# Altium PCB AC_board.PcbDoc (part 2 of 3)
Units mil, origin at the board's own origin, x right, y up, seen from the top; angles counter-clockwise.
Board outline 5905.51 x 3937.01 mil, 4 copper layers (Top Layer, Layer 1, Layer 2, Bottom Layer), stack 31.891 mil thick; 28 components, 29 nets, 132 pads, 3623 vias.
Unrouted connection lines stored in the file: 10.
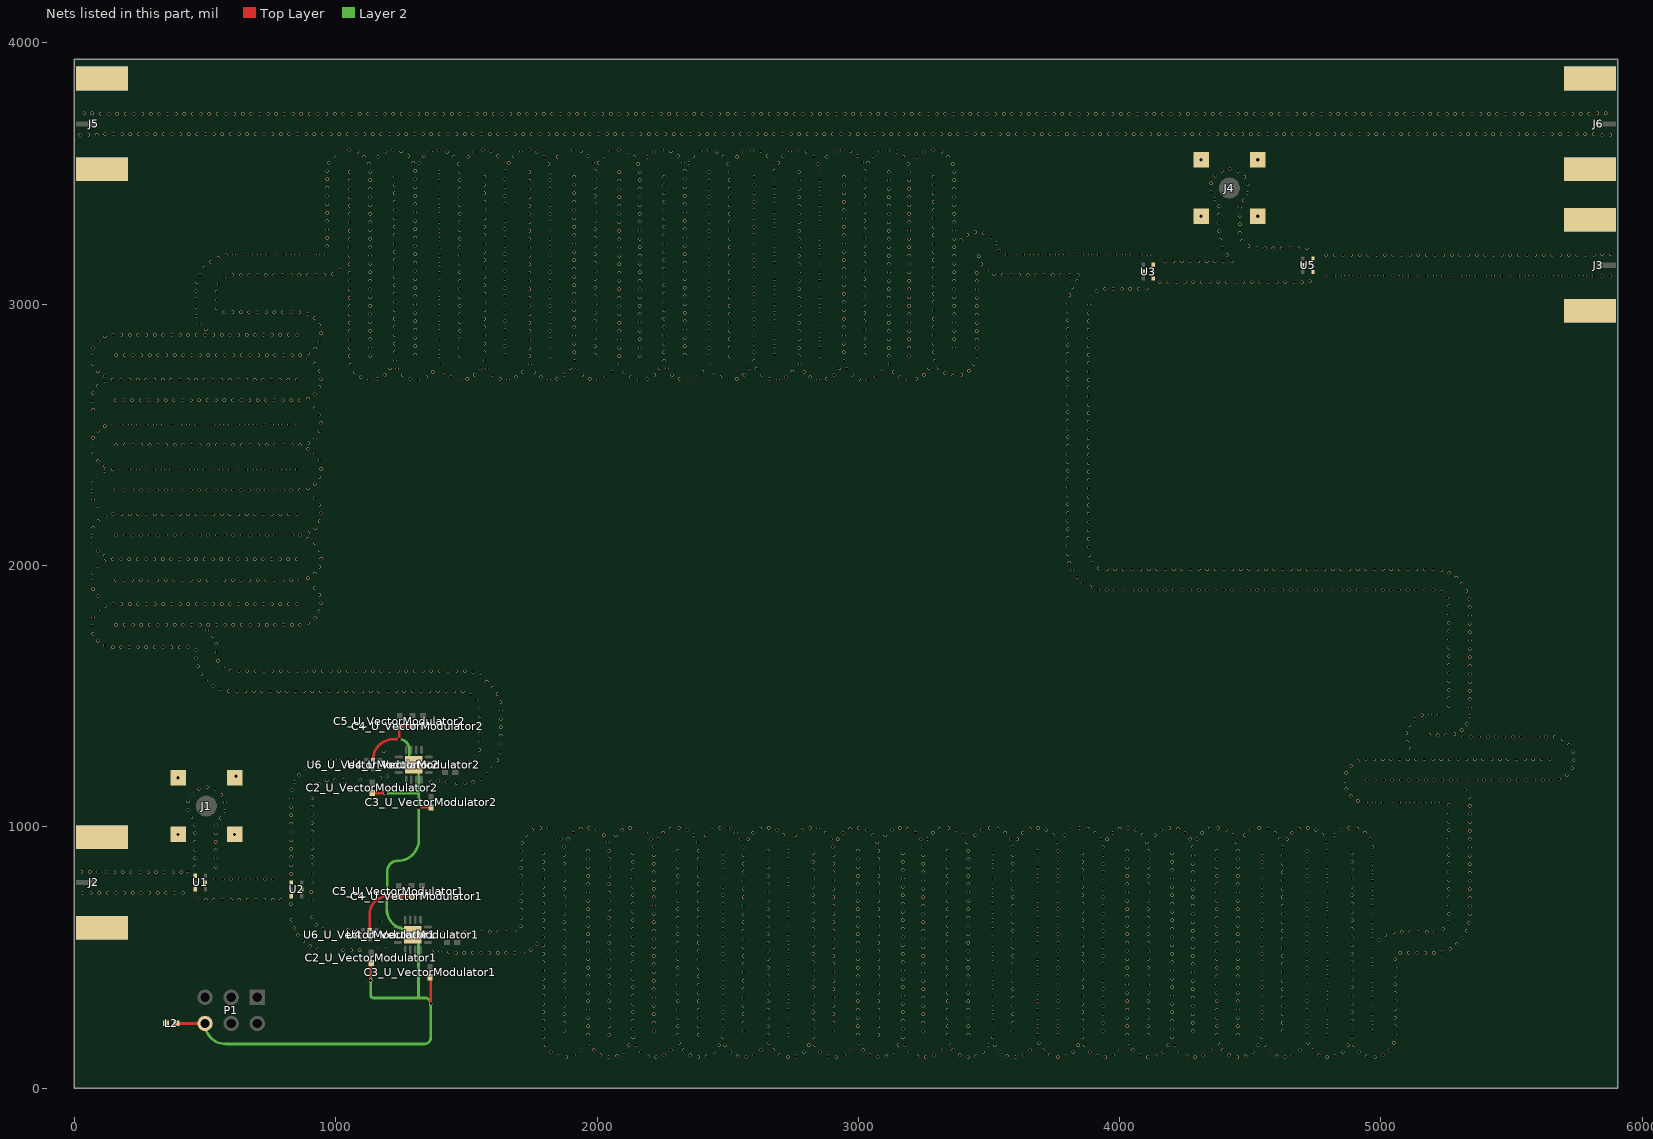
[diagram p4: the nets of this part, all layers, seen from the top]

## Via types
v1: diameter 12, hole 10, Top Layer to Bottom Layer, 3602 vias
v2: diameter 14, hole 12, Top Layer to Bottom Layer, 11 vias
v3: diameter 15, hole 12, Top Layer to Bottom Layer, 10 vias

## Nets (pads, with @x,y where several pads share a name; then routed paths per layer and width w, separated by ;. In a path a pad name is that pad's centre, name@x,y a point inside that pad or via, vN(x,y) a via of type N, cw(c..) or ccw(c..) an arc to the next point about the centre after c; other vN are vias at no path point) (continued)
AGND: (continued)
  other v1: 1882.51,118.79 2043.94,118.68 2226.3,118.79 2387.74,118.68 2570.08,118.79 2731.54,118.68 2913.86,118.79 3075.33,118.68 3257.64,118.79 3419.13,118.68 3601.43,118.79 3762.93,118.68 3945.21,118.79 4106.73,118.68 4288.99,118.79 4450.53,118.68 4632.78,118.78 4794.32,118.68 4976.56,118.78 1850.76,122.8 2075.63,123.11 2194.55,122.8 2419.43,123.12 2538.33,122.8 2763.23,123.12 2882.11,122.81 3107.02,123.12 3225.9,122.81 3450.82,123.12 3569.68,122.81 3794.62,123.13 3913.47,122.82 4138.42,123.13 4257.25,122.82 4482.21,123.13 4601.03,122.82 4826.01,123.14 4944.82,122.82 1913.41,127.12 2012.98,126.81 2257.19,127.12 2356.78,126.8 2600.98,127.11 2700.58,126.8 2944.76,127.11 3044.38,126.8 3288.54,127.11 3388.18,126.79 3632.33,127.11 3731.98,126.79 3976.11,127.1 4075.77,126.79 4319.9,127.1 4419.57,126.78 4663.68,127.1 4763.37,126.78 5007.46,127.09 1822.99,138.69 2103.3,139.19 2166.77,138.69 2447.1,139.19 2510.56,138.7 2790.89,139.2 2854.34,138.7 3134.69,139.2 3198.13,138.71 3478.49,139.21 3541.91,138.71 3822.28,139.21 3885.7,138.72 4166.08,139.22 4229.48,138.72 4509.88,139.22 4573.27,138.73 4853.67,139.23 4917.05,138.73 1987.35,145.96 2331.15,145.95 2674.94,145.95 3018.74,145.94 3362.53,145.93 3706.33,145.93 4050.12,145.92 4393.92,145.92 4737.71,145.91 1938.79,146.61 2282.57,146.61 2626.36,146.6 2970.14,146.59 3313.93,146.59 3657.72,146.58 4001.5,146.58 4345.29,146.57 4689.08,146.57 5032.86,146.56 1803.25,163.87 2147.04,163.88 2490.82,163.89 2834.61,163.9 3178.4,163.9 3522.19,163.91 3865.97,163.92 4209.76,163.92 4553.55,163.93 4897.34,163.94 2122.7,164.63 2466.5,164.64 2810.29,164.65 3154.08,164.66 3497.88,164.66 3841.67,164.67 4185.46,164.68 4529.26,164.68 4873.05,164.69 4377.69,173.5 4721.49,173.49 1971.14,173.55 2314.93,173.54 2658.72,173.53 3002.52,173.52 3346.31,173.52 3690.11,173.51 4033.9,173.5 5048.91,174.25 1794.77,194.73 2138.56,194.74 2482.35,194.75 2826.14,194.75 3169.93,194.76 3513.72,194.77 3857.51,194.78 4201.3,194.78 4545.09,194.79 4888.88,194.8 1966.39,205.19 2045.19,204.73 2310.18,205.19 2388.98,204.82 2653.98,205.18 2732.77,204.9 2997.77,205.17 3076.56,204.98 3341.56,205.16 3420.35,205.05 3685.35,205.15 3764.14,205.12 4029.14,205.15 4107.93,205.18 4372.93,205.14 4451.72,205.23 4716.72,205.13 4795.52,205.28 5053.36,205.94 1873.29,219.35 2217.08,219.27 2560.88,219.19 2904.67,219.12 3248.46,219.05 3592.25,218.98 3936.04,218.92 4279.83,218.87 4623.62,218.83 4967.41,218.79 1794.5,226.73 2138.29,226.74 2482.08,226.74 2825.87,226.75 3169.66,226.76 3513.45,226.77 3857.24,226.78 4201.03,226.78 4544.82,226.79 4888.62,226.8 1966.39,237.19 2045.19,236.73 2310.18,237.19 2388.98,236.82 2653.98,237.18 2732.77,236.9 2997.77,237.17 3076.56,236.98 3341.56,237.16 3420.35,237.05 3685.35,237.15 3764.14,237.12 4029.14,237.15 4107.93,237.18 4372.93,237.14 4451.72,237.23 4716.72,237.13 4795.52,237.28 5053.36,237.94 1873.29,251.35 2217.08,251.27 2560.88,251.19 2904.67,251.12 3248.46,251.05 3592.25,250.98 3936.04,250.92 4279.83,250.87 4623.62,250.83 4967.41,250.79 1794.5,258.73 2138.29,258.74 2482.08,258.74 2825.87,258.75 3169.66,258.76 3513.45,258.77 3857.24,258.78 4201.03,258.78 4544.82,258.79 4888.62,258.8 1966.39,269.19 2045.19,268.73 2310.18,269.19 2388.98,268.82 2653.98,269.18 2732.77,268.9 2997.77,269.17 3076.56,268.98 3341.56,269.16 3420.35,269.05 3685.35,269.15 3764.14,269.12 4029.14,269.15 4107.93,269.18 4372.93,269.14 4451.72,269.23 4716.72,269.13 4795.52,269.28 5053.36,269.94 1873.29,283.35 2217.08,283.27 2560.88,283.19 2904.67,283.12 3248.46,283.05 3592.25,282.98 3936.04,282.92 4279.83,282.87 4623.62,282.83 4967.41,282.79 1794.5,290.73 2138.29,290.74 2482.08,290.74 2825.87,290.75 3169.66,290.76 3513.45,290.77 3857.24,290.78 4201.03,290.78 4544.82,290.79 4888.62,290.8 1966.39,301.19 2045.19,300.73 2310.18,301.19 2388.98,300.82 2653.98,301.18 2732.77,300.9 2997.77,301.17 3076.56,300.98 3341.56,301.16 3420.35,301.05 3685.35,301.15 3764.14,301.12 4029.14,301.15 4107.93,301.18 4372.93,301.14 4451.72,301.23 4716.72,301.13 4795.52,301.28 5053.36,301.94 1873.29,315.35 2217.08,315.27 2560.88,315.19 2904.67,315.12 3248.46,315.05 3592.25,314.98 3936.04,314.92 4279.83,314.87 4623.62,314.83 4967.41,314.79 1794.5,322.73 2138.29,322.74 2482.08,322.74 2825.87,322.75 3169.66,322.76 3513.45,322.77 3857.24,322.78 4201.03,322.78 4544.82,322.79 4888.62,322.8 1966.39,333.19 2045.19,332.73 2310.18,333.19 2388.98,332.82 2653.98,333.18 2732.77,332.9 2997.77,333.17 3076.56,332.98 3341.56,333.16 3420.35,333.05 3685.35,333.15 3764.14,333.12 4029.14,333.15 4107.93,333.18 4372.93,333.14 4451.72,333.23 4716.72,333.13 4795.52,333.28 5053.36,333.94 1873.29,347.35 2217.08,347.27 2560.88,347.19 2904.67,347.12 3248.46,347.05 3592.25,346.98 3936.04,346.92 4279.83,346.87 4623.62,346.83 4967.41,346.79 1794.5,354.73 2138.29,354.74 2482.08,354.74 2825.87,354.75 3169.66,354.76 3513.45,354.77 3857.24,354.78 4201.03,354.78 4544.82,354.79 4888.62,354.8 1966.39,365.19 2045.19,364.73 2310.18,365.19 2388.98,364.82 2653.98,365.18 2732.77,364.9 2997.77,365.17 3076.56,364.98 3341.56,365.16 3420.35,365.05 3685.35,365.15 3764.14,365.12 4029.14,365.15 4107.93,365.18 4372.93,365.14 4451.72,365.23 4716.72,365.13 4795.52,365.28 5053.36,365.94 1873.29,379.35 2217.08,379.27 2560.88,379.19 2904.67,379.12 3248.46,379.05 3592.25,378.98 3936.04,378.92 4279.83,378.87 4623.62,378.83 4967.41,378.79 1794.5,386.73 2138.29,386.74 2482.08,386.74 2825.87,386.75 3169.66,386.76 3513.45,386.77 3857.24,386.78 4201.03,386.78 4544.82,386.79 4888.62,386.8 1966.39,397.19 2045.19,396.73 2310.18,397.19 2388.98,396.82 2653.98,397.18 2732.77,396.9 2997.77,397.17 3076.56,396.98 3341.56,397.16 3420.35,397.05 3685.35,397.15 3764.14,397.12 4029.14,397.15 4107.93,397.18 4372.93,397.14 4451.72,397.23 4716.72,397.13 4795.52,397.28 5053.36,397.94 1873.29,411.35 2217.08,411.27 2560.88,411.19 2904.67,411.12 3248.46,411.05 3592.25,410.98 3936.04,410.92 4279.83,410.87 4623.62,410.83 4967.41,410.79 1794.5,418.73 2138.29,418.74 2482.08,418.74 2825.87,418.75 3169.66,418.76 3513.45,418.77 3857.24,418.78 4201.03,418.78 4544.82,418.79 4888.62,418.8 1966.39,429.19 2045.19,428.73 2310.18,429.19 2388.98,428.82 2653.98,429.18 2732.77,428.9 2997.77,429.17 3076.56,428.98 3341.56,429.16 3420.35,429.05 3685.35,429.15 3764.14,429.12 4029.14,429.15 4107.93,429.18 4372.93,429.14 4451.72,429.23 4716.72,429.13 4795.52,429.28 5053.36,429.94 1873.29,443.35 2217.08,443.27 2560.88,443.19 2904.67,443.12 3248.46,443.05 3592.25,442.98 3936.04,442.92 4279.83,442.87 4623.62,442.83 4967.41,442.79 1794.5,450.73 2138.29,450.74 2482.08,450.74 2825.87,450.75 3169.66,450.76 3513.45,450.77 3857.24,450.78 4201.03,450.78 4544.82,450.79 4888.62,450.8 1966.39,461.19 2045.19,460.73 2310.18,461.19 2388.98,460.82 2653.98,461.18 2732.77,460.9 2997.77,461.17 3076.56,460.98 3341.56,461.16 3420.35,461.05 3685.35,461.15 3764.14,461.12 4029.14,461.15 4107.93,461.18 4372.93,461.14 4451.72,461.23 4716.72,461.13 4795.52,461.28 5053.36,461.94 1873.29,475.35 2217.08,475.27 2560.88,475.19 2904.67,475.12 3248.46,475.05 3592.25,474.98 3936.04,474.92 4279.83,474.87 4623.62,474.83 4967.41,474.79 1794.5,482.73 2138.29,482.74 2482.08,482.74 2825.87,482.75 3169.66,482.76 3513.45,482.77 3857.24,482.78 4201.03,482.78 4544.82,482.79 4888.62,482.8 1966.39,493.19 2045.19,492.73 2310.18,493.19 2388.98,492.82 2653.98,493.18 2732.77,492.9 2997.77,493.17 3076.56,492.98 3341.56,493.16 3420.35,493.05 3685.35,493.15 3764.14,493.12 4029.14,493.15 4107.93,493.18 4372.93,493.14 4451.72,493.23 4716.72,493.13 4795.52,493.28 5053.36,493.94 1873.29,507.35 2217.08,507.27 2560.88,507.19 2904.67,507.12 3248.46,507.05 3592.25,506.98 3936.04,506.92 4279.83,506.87 4623.62,506.83 4967.41,506.79 1794.5,514.73 2138.29,514.74 2482.08,514.74 2825.87,514.75 3169.66,514.76 3513.45,514.77 3857.24,514.78 4201.03,514.78 4544.82,514.79 4888.62,514.8 1460.12,516.89 1492.07,518.6 1524.07,518.6 1556.07,518.6 1588.07,518.6 1620.07,518.6 1652.07,518.6 1684.07,518.6 5073.74,518.6 5105.74,518.6 5137.74,518.6 5169.74,518.6 5201.74,518.56 1716.06,519.51 1370,521 1432.09,521.93 5233.46,522.83 1400.13,523.52 1966.39,525.19 2045.19,524.73 2310.18,525.19 2388.98,524.82 2653.98,525.18 2732.77,524.9 2997.77,525.17 3076.56,524.98 3341.56,525.16 3420.35,525.05 3685.35,525.15 3764.14,525.12 4029.14,525.15 4107.93,525.18 4372.93,525.14 4451.72,525.23 4716.72,525.13 4795.52,525.28 1028.25,528.11 1060.25,528.11 1092.25,528.11 1746.38,529.74 932.55,532.48 5263.47,533.93 1161.97,534.79 1873.29,539.35 2217.08,539.27 2560.88,539.19 2904.67,539.12 3248.46,539.05 3592.25,538.98 3936.04,538.92 4279.83,538.87 4623.62,538.83 4967.41,538.79 902.62,543.79 1192.32,544.93 1794.5,546.73 2138.29,546.74 2482.08,546.74 2825.87,546.75 3169.66,546.76 3513.45,546.77 3857.24,546.78 4201.03,546.78 4544.82,546.79 4888.62,546.8 1770.28,551.02 5290.03,551.78 1966.39,557.19 2045.19,556.73 2310.18,557.19 2388.98,556.82 2653.98,557.18 2732.77,556.9 2997.77,557.17 3076.56,556.98 3341.56,557.16 3420.35,557.05 3685.35,557.15 3764.14,557.12 4029.14,557.15 4107.93,557.18 4372.93,557.14 4451.72,557.23 4716.72,557.13 4795.52,557.28 876.38,562.12 4992.56,566.18 1873.29,571.35 2217.08,571.27 2560.88,571.19 2904.67,571.12 3248.46,571.05 3592.25,570.98 3936.04,570.92 4279.83,570.87 4623.62,570.83 4967.41,570.79 5312.04,575.01 1794.5,578.73 2138.29,578.74 2482.08,578.74 2825.87,578.75 3169.66,578.76 3513.45,578.77 3857.24,578.78 4201.03,578.78 4544.82,578.79 4888.62,578.8 854.86,585.79 5016.85,587.02 1966.39,589.19 2045.19,588.73 2310.18,589.19 2388.98,588.82 2653.98,589.18 2732.77,588.9 2997.77,589.17 3076.56,588.98 3341.56,589.16 3420.35,589.05 3685.35,589.15 3764.14,589.12 4029.14,589.15 4107.93,589.18 4372.93,589.14 4451.72,589.23 4716.72,589.13 4795.52,589.28 1444.6,593.17 1411.79,593.75 1493.73,597.4 1525.73,597.4 1557.73,597.4 1589.73,597.4 1621.73,597.4 1653.73,597.4 1685.73,597.4 5047.35,596.69 5079.34,597.4 5111.34,597.4 5143.34,597.4 5175.34,597.4 5207.33,598.17 1873.29,603.35 2217.08,603.27 2560.88,603.19 2904.67,603.12 3248.46,603.05 3592.25,602.98 3936.04,602.92 4279.83,602.87 4623.62,602.83 4967.41,602.79 5327.86,602.83 1047.4,606.91 1073,608 951.47,609.14 5236.93,610.35 1794.5,610.73 2138.29,610.74 2482.08,610.74 2825.87,610.75 3169.66,610.76 3513.45,610.77 3857.24,610.78 4201.03,610.78 4544.82,610.79 4888.62,610.8 839.82,614.04 1708.55,619.83 1966.39,621.19 2045.19,620.73 2310.18,621.19 2388.98,620.82 2653.98,621.18 2732.77,620.9 2997.77,621.17 3076.56,620.98 3341.56,621.16 3420.35,621.05 3685.35,621.15 3764.14,621.12 4029.14,621.15 4107.93,621.18 4372.93,621.14 4451.72,621.23 4716.72,621.13 4795.52,621.28 924.09,625.7 5337.29,633.41 1873.29,635.35 2217.08,635.27 2560.88,635.19 2904.67,635.12 3248.46,635.05 3592.25,634.98 3936.04,634.92 4279.83,634.87 4623.62,634.83 4967.41,634.79 5256.25,635.86 1170.84,638.32 1794.5,642.73 2138.29,642.74 2482.08,642.74 2825.87,642.75 3169.66,642.76 3513.45,642.77 3857.24,642.78 4201.03,642.78 4544.82,642.79 4888.62,642.8 831.39,644.91 1708.55,651.83 1966.39,653.19 2045.19,652.73 2310.18,653.19 2388.98,652.82 2653.98,653.18 2732.77,652.9 2997.77,653.17 3076.56,652.98 3341.56,653.16 3420.35,653.05 3685.35,653.15 3764.14,653.12 4029.14,653.15 4107.93,653.18 4372.93,653.14 4451.72,653.23 4716.72,653.13 4795.52,653.28 909.92,654.39 5339.4,665.34 1873.29,667.35 2217.08,667.27 2560.88,667.19 2904.67,667.12 3248.46,667.05 3592.25,666.98 3936.04,666.92 4279.83,666.87 4623.62,666.83 4967.41,666.79 5260.6,667.56 1794.5,674.73 2138.29,674.74 2482.08,674.74 2825.87,674.75 3169.66,674.76 3513.45,674.77 3857.24,674.78 4201.03,674.78 4544.82,674.79 4888.62,674.8 1708.55,683.83 1966.39,685.19 2045.19,684.73 2310.18,685.19 2388.98,684.82 2653.98,685.18 2732.77,684.9 2997.77,685.17 3076.56,684.98 3341.56,685.16 3420.35,685.05 3685.35,685.15 3764.14,685.12 4029.14,685.15 4107.93,685.18 4372.93,685.14 4451.72,685.23 4716.72,685.13 4795.52,685.28 5339.4,697.34 1873.29,699.35 2217.08,699.27 2560.88,699.19 2904.67,699.12 3248.46,699.05 3592.25,698.98 3936.04,698.92 4279.83,698.87 4623.62,698.83 4967.41,698.79 5260.6,699.56 828,704 1794.5,706.73 2138.29,706.74 2482.08,706.74 2825.87,706.75 3169.66,706.76 3513.45,706.77 3857.24,706.78 4201.03,706.78 4544.82,706.79 4888.62,706.8 1708.55,715.83 1966.39,717.19 2045.19,716.73 2310.18,717.19 2388.98,716.82 2653.98,717.18 2732.77,716.9 2997.77,717.17 3076.56,716.98 3341.56,717.16 3420.35,717.05 3685.35,717.15 3764.14,717.12 4029.14,717.15 4107.93,717.18 4372.93,717.14 4451.72,717.23 4716.72,717.13 4795.52,717.28 908.89,718.37 502.93,722.02 534.93,722.02 566.93,722.02 598.93,722.02 630.93,722.02 662.93,722.02 694.93,722.02 726.93,722.02 758.93,722.02 790.93,722.02 471,728 5339.4,729.34 1873.29,731.35 2217.08,731.27 2560.88,731.19 2904.67,731.12 3248.46,731.05 3592.25,730.98 3936.04,730.92 4279.83,730.87 4623.62,730.83 4967.41,730.79 5260.6,731.56 1794.5,738.73 2138.29,738.74 2482.08,738.74 2825.87,738.75 3169.66,738.76 3513.45,738.77 3857.24,738.78 4201.03,738.78 4544.82,738.79 4888.62,738.8 31.21,746.13 63.21,746.13 95.16,748 127.16,748 159.16,748 191.16,748 223.16,748 255.16,748 287.16,748 319.16,748 351.16,748 383.16,748 415.16,748 1708.55,747.83 1966.39,749.19 2045.19,748.73 2310.18,749.19 2388.98,748.82 2653.98,749.18 2732.77,748.9 2997.77,749.17 3076.56,748.98 3341.56,749.16 3420.35,749.05 3685.35,749.15 3764.14,749.12 4029.14,749.15 4107.93,749.18 4372.93,749.14 4451.72,749.23 4716.72,749.13 4795.52,749.28 906.31,750.27 5339.4,761.34 1873.29,763.35 2217.08,763.27 2560.88,763.19 2904.67,763.12 3248.46,763.05 3592.25,762.98 3936.04,762.92 4279.83,762.87 4623.62,762.83 4967.41,762.79 5260.6,763.56 1794.5,770.73 2138.29,770.74 2482.08,770.74 2825.87,770.75 3169.66,770.76 3513.45,770.77 3857.24,770.78 4201.03,770.78 4544.82,770.79 4888.62,770.8 1708.55,779.83 1966.39,781.19 2045.19,780.73 2310.18,781.19 2388.98,780.82 2653.98,781.18 2732.77,780.9 2997.77,781.17 3076.56,780.98 3341.56,781.16 3420.35,781.05 3685.35,781.15 3764.14,781.12 4029.14,781.15 4107.93,781.18 4372.93,781.14 4451.72,781.23 4716.72,781.13 4795.52,781.28 908.89,789.86 5339.4,793.34 1873.29,795.35 2217.08,795.27 2560.88,795.19 2904.67,795.12 3248.46,795.05 3592.25,794.98 3936.04,794.92 4279.83,794.87 4623.62,794.83 4967.41,794.79 5260.6,795.56 536.47,800.81 568.47,800.81 600.47,800.81 632.47,800.81 664.47,800.81 696.47,800.81 728.47,800.81 760.47,800.81 792.47,800.81 1794.5,802.73 2138.29,802.74 2482.08,802.74 2825.87,802.75 3169.66,802.76 3513.45,802.77 3857.24,802.78 4201.03,802.78 4544.82,802.79 4888.62,802.8 1708.55,811.83 1966.39,813.19 2045.19,812.73 2310.18,813.19 2388.98,812.82 2653.98,813.18 2732.77,812.9 2997.77,813.17 3076.56,812.98 3341.56,813.16 3420.35,813.05 3685.35,813.15 3764.14,813.12 4029.14,813.15 4107.93,813.18 4372.93,813.14 4451.72,813.23 4716.72,813.13 4795.52,813.28 830.09,820.68 908.89,821.86 5339.4,825.34 121.08,826.8 153.08,826.8 185.08,826.8 217.08,826.8 249.08,826.8 281.08,826.8 313.08,826.8 345.08,826.8 377.08,826.8 409.08,826.8 1873.29,827.35 2217.08,827.27 2560.88,827.19 2904.67,827.12 3248.46,827.05 3592.25,826.98 3936.04,826.92 4279.83,826.87 4623.62,826.83 4967.41,826.79 89.09,827.6 5260.6,827.56 26.66,828.67 58.66,828.67 433,830 1794.5,834.73 2138.29,834.74 2482.08,834.74 2825.87,834.75 3169.66,834.76 3513.45,834.77 3857.24,834.78 4201.03,834.78 4544.82,834.79 4888.62,834.8 1708.55,843.83 1966.39,845.19 2045.19,844.73 2310.18,845.19 2388.98,844.82 2653.98,845.18 2732.77,844.9 2997.77,845.17 3076.56,844.98 3341.56,845.16 3420.35,845.05 3685.35,845.15 3764.14,845.12 4029.14,845.15 4107.93,845.18 4372.93,845.14 4451.72,845.23 4716.72,845.13 4795.52,845.28 540.97,847.31 462.18,848.04 830.09,852.68 908.89,853.86 5339.4,857.34 1873.29,859.35 2217.08,859.27 2560.88,859.19 2904.67,859.12 3248.46,859.05 3592.25,858.98 3936.04,858.92 4279.83,858.87 4623.62,858.83 4967.41,858.79 5260.6,859.56 1794.5,866.73 2138.29,866.74 2482.08,866.74 2825.87,866.75 3169.66,866.76 3513.45,866.77 3857.24,866.78 4201.03,866.78 4544.82,866.79 4888.62,866.8 1708.55,875.83 1966.39,877.19 2045.19,876.73 2310.18,877.19 2388.98,876.82 2653.98,877.18 2732.77,876.9 2997.77,877.17 3076.56,876.98 3341.56,877.16 3420.35,877.05 3685.35,877.15 3764.14,877.12 4029.14,877.15 4107.93,877.18 4372.93,877.14 4451.72,877.23 4716.72,877.13 4795.52,877.28 540.97,879.31 462.18,880.04 830.09,884.68 908.89,885.86 5339.4,889.34 1873.29,891.35 2217.08,891.27 2560.88,891.19 2904.67,891.12 3248.46,891.05 3592.25,890.98 3936.04,890.92 4279.83,890.87 4623.62,890.83 4967.41,890.79 5260.6,891.56 1794.5,898.73 2138.29,898.74 2482.08,898.74 2825.87,898.75 3169.66,898.76 3513.45,898.77 3857.24,898.78 4201.03,898.78 4544.82,898.79 4888.62,898.8 1708.55,907.83 1966.39,909.19 2045.19,908.73 2310.18,909.19 2388.98,908.82 2653.98,909.18 2732.77,908.9 2997.77,909.17 3076.56,908.98 3341.56,909.16 3420.35,909.05 3685.35,909.15 3764.14,909.12 4029.14,909.15 4107.93,909.18 4372.93,909.14 4451.72,909.23 4716.72,909.13 4795.52,909.28 540.97,911.31 462.18,912.04 830.09,916.68 908.89,917.86 5339.4,921.34 1872.75,923.35 2216.55,923.27 2560.35,923.19 2904.15,923.11 3247.95,923.04 3591.75,922.98 3935.55,922.92 4279.35,922.87 4623.15,922.82 4966.94,922.78 5260.6,923.56 1712.22,939.62 2041.26,940.49 2385.01,940.57 2728.77,940.65 3072.53,940.73 3416.3,940.79 3760.06,940.86 4103.83,940.91 4447.6,940.96 4791.37,941.01 540.97,943.31 462.18,944.04 830.09,948.68 908.89,949.86 1889.77,953.28 2233.52,953.21 2577.27,953.14 2921.02,953.07 3264.78,953.01 3608.54,952.95 3952.3,952.9 4296.06,952.85 4639.83,952.81 4957.96,953.5 5339.4,953.34 1863.55,954 2207.39,953.92 2551.22,953.85 2895.05,953.79 3238.87,953.73 3582.7,953.67 3926.52,953.62 4270.34,953.57 4614.15,953.53 5260.6,955.56 1727.67,967.64 2025.53,968.35 2071.51,967.71 2369.26,968.43 2415.36,967.78 2713,968.5 2759.2,967.85 3103.03,967.91 3446.87,967.97 3790.7,968.02 4134.52,968.06 4478.35,968.1 4822.16,968.14 3056.74,968.56 3400.49,968.62 3744.24,968.67 4087.99,968.72 4431.75,968.76 4775.51,968.8 540.97,975.31 462.18,976.04 1909.97,978.1 2253.69,978.05 2597.41,978 2874.67,978.46 2941.14,977.95 3218.52,978.42 3284.88,977.91 3562.36,978.38 3628.62,977.87 3906.2,978.34 3972.36,977.83 4250.04,978.31 4316.1,977.8 4593.87,978.28 4659.86,977.77 4937.69,978.26 1843.11,978.61 2186.97,978.56 2530.82,978.51 830.09,980.68 908.89,981.86 5339.4,985.34 1752.42,987.93 2000.56,988.37 2096.28,987.97 2344.27,988.41 2440.15,988.02 2687.98,988.45 2784.01,988.06 3031.7,988.48 3127.87,988.09 3471.72,988.13 3815.56,988.16 4159.4,988.19 4503.24,988.21 4847.07,988.24 5260.6,987.56 3375.42,988.51 3719.15,988.53 4062.88,988.56 4406.62,988.58 4750.37,988.6 4687.73,993.49 1814.98,993.87 1937.93,993.65 2158.85,993.85 2281.64,993.63 2502.73,993.83 2625.35,993.61 2846.59,993.81 2969.06,993.59 3190.45,993.79 3312.78,993.57 3534.31,993.77 3656.51,993.55 3878.16,993.76 4000.24,993.53 4222,993.74 4343.98,993.51 4565.84,993.73 4909.67,993.72 1783.13,996.92 1969.75,997.04 2127,996.94 2313.46,997.05 2470.88,996.95 2657.16,997.06 2814.75,996.96 3000.87,997.07 3158.61,996.97 3344.59,997.08 3502.47,996.98 3688.31,997.09 3846.32,996.98 4032.04,997.1 4190.17,996.99 4375.78,997.1 4534.01,997 4719.52,997.11 4877.84,997 540.97,1007.31 462.18,1008.04 830.09,1012.68 908.89,1013.86 5339.4,1017.34 5260.6,1019.56 559.51,1033.39 447.95,1036.7 830.09,1044.68 908.89,1045.86 5339.4,1049.34 5260.6,1051.56 574.34,1061.75 434.63,1065.8 830.09,1076.68 908.89,1077.86 5339.4,1081.34 5260.6,1083.56 4942.2,1093.37 575.43,1093.73 4974.2,1093.55 5006.2,1093.55 5038.2,1093.55 5070.2,1093.55 5102.2,1093.55 5134.2,1093.55 5166.2,1093.55 5198.2,1093.55 5230.2,1093.55 435.53,1097.79 4910.94,1100.2 830.09,1108.68 908.89,1109.86 5336.11,1113.17 4884.36,1118.02 562.34,1122.93 450.2,1126.23 832.58,1140.58 915.64,1141.14 5321.15,1141.46 538.02,1143.73 475.8,1145.43 4866.87,1144.82 507.03,1151.7 936.51,1165.39 1462.56,1166.89 1494.52,1168.6 842.33,1171.06 1424.41,1171.93 1526.37,1171.7 1365,1173 1392.67,1176 4860.35,1176.15 965.83,1178.22 997.82,1179.11 1029.82,1179.11 1093.82,1179.11 4947.02,1179.5 4979.02,1179.5 5011.02,1179.5 5043.02,1179.5 5075.02,1179.5 5107.02,1179.5 5139.02,1179.5 5171.02,1179.5 5203.02,1179.5 5235.02,1179.5 5267.02,1179.5 5299.02,1179.5 5331.02,1179.5 5363.02,1179.5 5395.02,1179.5 5427.02,1179.5 5459.02,1179.5 5491.02,1179.5 5523.02,1179.5 5555.02,1179.5 5587.02,1179.5 5619.02,1179.5 5651.02,1179.5 1555.95,1183.89 5682.77,1183.54 1171,1187 1196.09,1194.11 858.77,1198.51 5710.59,1199.34 1580.79,1204.07 4867.04,1207.44 880.81,1221.71 5730.5,1224.4 1602.58,1227.5 4884.68,1234.14 906.79,1240.4 1395.49,1241.42 1436.91,1243.17 1475.59,1248.31 1507.59,1248.54 4911.35,1251.81 936.37,1252.59 1618.93,1255.01 5739.08,1255.23 975.73,1257.91 1007.73,1257.91 1071.73,1257.91 4974.64,1258.29 5006.64,1258.29 5038.64,1258.29 5070.64,1258.29 5102.64,1258.29 5134.64,1258.29 5166.64,1258.29 5198.64,1258.29 5230.64,1258.29 5262.64,1258.29 5294.64,1258.29 5326.64,1258.29 5358.64,1258.29 5390.64,1258.29 5422.64,1258.29 5454.64,1258.29 5486.64,1258.29 5518.64,1258.29 5550.64,1258.29 5582.64,1258.29 5614.64,1258.29 5646.64,1258.29 4942.64,1258.53 1533.12,1267.84 1628.73,1285.47 5735.58,1287.04 1183.84,1289.32 1549.74,1295.18 5113.21,1297.8 5719.93,1314.95 1631.4,1317.36 5098.9,1326.42 1552.6,1327.05 5695.03,1335.06 5312.27,1344.24 5344.27,1344.24 5376.27,1344.24 5408.27,1344.24 5440.27,1344.24 5472.27,1344.24 5504.27,1344.24 5536.27,1344.24 5568.27,1344.24 5600.27,1344.24 5632.27,1344.24 5664.26,1343.84 1631.4,1349.36 5185.07,1351.39 5217.07,1351.39 5249.07,1351.39 5280.89,1354.86 5096.92,1358.36 1552.6,1359.05 5309.05,1370.06 1631.4,1381.36 5106.95,1388.74 1552.6,1391.05 5329.56,1394.62 1631.4,1413.36 5128.07,1412.79 1552.6,1423.05 5338.83,1425.25 5156.61,1427.26 5188.48,1430.19 5220.48,1430.19 5252.48,1430.19 1631.4,1445.36 1552.6,1455.05 5339.4,1457.24 5260.6,1461.14 1629.97,1477.33 1538.5,1483.78 5339.4,1489.24 5260.6,1493.14 1515.88,1506.41 1619.48,1507.56 590.3,1519.48 622.29,1518.6 654.29,1518.6 686.29,1518.6 718.29,1518.6 750.29,1518.6 782.29,1518.6 814.29,1518.6 846.29,1518.6 878.29,1518.6 910.29,1518.6 942.29,1518.6 974.29,1518.6 1006.29,1518.6 1038.29,1518.6 1070.29,1518.6 1102.29,1518.6 1134.29,1518.6 1166.29,1518.6 1198.29,1518.6 1230.29,1518.6 1262.29,1518.6 1294.29,1518.6 1326.29,1518.6 1358.29,1518.6 1390.29,1518.6 1422.29,1518.6 1454.29,1518.6 1486.29,1518.6 5339.4,1521.24 5260.6,1525.14 559.04,1526.32 1600.44,1533.28 530.33,1540.45 5339.4,1553.24 1577.81,1555.9 5260.6,1557.14 505.36,1560.46 1553.93,1577.21 5339.4,1585.24 485.9,1585.86 5260.6,1589.14 1525.23,1591.36 629.79,1597.4 661.79,1597.4 693.79,1597.4 725.79,1597.4 757.79,1597.4 789.79,1597.4 821.79,1597.4 853.79,1597.4 885.79,1597.4 917.79,1597.4 949.79,1597.4 981.79,1597.4 1013.79,1597.4 1045.79,1597.4 1077.79,1597.4 1109.79,1597.4 1141.79,1597.4 1173.79,1597.4 1205.79,1597.4 1237.79,1597.4 1269.79,1597.4 1301.79,1597.4 1333.79,1597.4 1365.79,1597.4 1397.79,1597.4 1429.79,1597.4 1461.79,1597.4 1493.79,1597.31 597.8,1598.16 568.18,1610.26 472.48,1614.91 5339.4,1617.24 5260.6,1621.14 548.79,1635.72 466.25,1646.3 5339.4,1649.24 5260.6,1653.14 544.4,1667.42 465.6,1678.3 5339.4,1681.24 5260.6,1685.14 146.97,1687.4 178.97,1687.55 210.97,1687.55 242.97,1687.55 274.97,1687.55 306.97,1687.55 338.97,1687.55 370.97,1687.55 402.97,1687.55 434.97,1687.55 115.72,1694.29 542.92,1699.38 89.19,1712.19 5339.4,1713.24 5260.6,1717.14 531.03,1729.09 71.78,1739.03 5339.4,1745.24 5260.6,1749.14 508.57,1751.89 65.38,1770.39 160.08,1773.5 192.08,1773.5 224.08,1773.5 256.08,1773.5 288.08,1773.5 320.08,1773.5 352.08,1773.5 384.08,1773.5 416.08,1773.5 448.08,1773.5 480.08,1773.5 512.08,1773.5 544.08,1773.5 576.08,1773.5 608.08,1773.5 640.08,1773.5 672.08,1773.5 704.08,1773.5 736.08,1773.5 768.08,1773.5 800.08,1773.5 832.08,1773.5 864.08,1773.48 5339.4,1777.24 895.27,1780.65 5260.6,1781.14 921.56,1798.89 72.13,1801.67 5339.4,1809.24 5260.6,1813.14 938.62,1825.96 89.85,1828.31 5339.4,1841.24 5260.6,1845.14 116.58,1845.91 179.88,1852.29 211.88,1852.29 243.88,1852.29 275.88,1852.29 307.88,1852.29 339.88,1852.29 371.88,1852.29 403.88,1852.29 435.88,1852.29 467.88,1852.29 499.88,1852.29 531.88,1852.29 563.88,1852.29 595.88,1852.29 627.88,1852.29 659.88,1852.29 691.88,1852.29 723.88,1852.29 755.88,1852.29 787.88,1852.29 819.88,1852.29 851.88,1852.29 147.88,1852.56 944.48,1857.42 5336.69,1873.13 5252.27,1876.04 90.41,1882.86 937.44,1888.64 5229.53,1898.54 5326.86,1903.58 3950.56,1906.6 3982.56,1906.6 4014.56,1906.6 4046.56,1906.6 4078.56,1906.6 4110.56,1906.6 4142.56,1906.6 4174.56,1906.6 4206.56,1906.6 4238.56,1906.6 4270.56,1906.6 4302.56,1906.6 4334.56,1906.6 4366.56,1906.6 4398.56,1906.6 4430.56,1906.6 4462.56,1906.6 4494.56,1906.6 4526.56,1906.6 4558.56,1906.6 4590.56,1906.6 4622.56,1906.6 4654.56,1906.6 4686.56,1906.6 4718.56,1906.6 4750.56,1906.6 4782.56,1906.6 4814.56,1906.6 4846.56,1906.6 4878.56,1906.6 4910.56,1906.6 4942.56,1906.6 4974.56,1906.6 5006.56,1906.6 5038.56,1906.6 5070.56,1906.6 5102.56,1906.6 5134.56,1906.6 5166.56,1906.6 5198.56,1906.6 72.44,1909.34 3918.61,1908.53 919.37,1915.04 3887.95,1917.67 5310.46,1931.06 3860.03,1933.31 65.48,1940.57 157.8,1945.39 189.8,1945.39 221.8,1945.39 253.8,1945.39 285.8,1945.39 317.8,1945.39 349.8,1945.39 381.8,1945.39 413.8,1945.39 445.8,1945.39 477.8,1945.39 509.8,1945.39 541.8,1945.39 573.8,1945.39 605.8,1945.39 637.8,1945.39 669.8,1945.39 701.8,1945.39 733.8,1945.39 765.8,1945.39 797.8,1945.39 829.8,1945.39 861.8,1945.14 893.13,1951.66 5288.06,1953.91 3836.56,1955.06 919.93,1969.15 5261.22,1971.34 71.49,1972 3818.42,1981.42 5230.97,1981.76 3951.18,1985.4 3983.18,1985.4 4015.18,1985.4 4047.18,1985.4 4079.18,1985.4 4111.18,1985.4 4143.18,1985.4 4175.18,1985.4 4207.18,1985.4 4239.18,1985.4 4271.18,1985.4 4303.18,1985.4 4335.18,1985.4 4367.18,1985.4 4399.18,1985.4 4431.18,1985.4 4463.18,1985.4 4495.18,1985.4 4527.18,1985.4 4559.18,1985.4 4591.18,1985.4 4623.18,1985.4 4655.18,1985.4 4687.18,1985.4 4719.18,1985.4 4751.18,1985.4 4783.18,1985.4 4815.18,1985.4 4847.18,1985.4 4879.18,1985.4 4911.18,1985.4 4943.18,1985.4 4975.18,1985.4 5007.18,1985.4 5039.18,1985.4 5071.18,1985.4 5103.18,1985.4 5135.18,1985.4 5167.18,1985.4 5199.18,1985.47 3919.5,1989.86 937.75,1995.73 88.65,1999.01 3894.12,2009.35 3807.12,2011.36 115.01,2017.15 146.22,2024.24 178.22,2024.19 210.22,2024.19 242.22,2024.19 274.22,2024.19 306.22,2024.19 338.22,2024.19 370.22,2024.19 402.22,2024.19 434.22,2024.19 466.22,2024.19 498.22,2024.19 530.22,2024.19 562.22,2024.19 594.22,2024.19 626.22,2024.19 658.22,2024.19 690.22,2024.19 722.22,2024.19 754.22,2024.19 786.22,2024.19 818.22,2024.19 850.22,2024.19 944.58,2027 115.78,2038.06 3882.14,2039.03 3802.56,2043.03 89.24,2055.94 938.33,2058.38 3881.4,2071.02 3802.6,2075.03 71.8,2082.77 921.02,2085.29 894.55,2103.28 3881.4,2103.02 3802.6,2107.03 65.37,2114.12 160.13,2117.29 192.13,2117.29 224.13,2117.29 256.13,2117.29 288.13,2117.29 320.13,2117.29 352.13,2117.29 384.13,2117.29 416.13,2117.29 448.13,2117.29 480.13,2117.29 512.13,2117.29 544.13,2117.29 576.13,2117.29 608.13,2117.29 640.13,2117.29 672.13,2117.29 704.13,2117.29 736.13,2117.29 768.13,2117.29 800.13,2117.29 832.13,2117.29 864.13,2117.27 895.31,2124.46 3881.4,2135.02 3802.6,2139.03 921.59,2142.72 72.11,2145.4 3881.4,2167.02 938.64,2169.8 3802.6,2171.03 89.81,2172.06 116.52,2189.68 147.82,2196.35 179.82,2196.08 211.82,2196.08 243.82,2196.08 275.82,2196.08 307.82,2196.08 339.82,2196.08 371.82,2196.08 403.82,2196.08 435.82,2196.08 467.82,2196.08 499.82,2196.08 531.82,2196.08 563.82,2196.08 595.82,2196.08 627.82,2196.08 659.82,2196.08 691.82,2196.08 723.82,2196.08 755.82,2196.08 787.82,2196.08 819.82,2196.08 851.82,2196.08 3881.4,2199.02 944.47,2201.26 3802.6,2203.03 90.37,2226.7 3881.4,2231.02 937.42,2232.48 3802.6,2235.03 72.42,2253.18 919.33,2258.87 3881.4,2263.02 3802.6,2267.03 65.48,2284.42 157.75,2289.18 189.75,2289.18 221.75,2289.18 253.75,2289.18 285.75,2289.18 317.75,2289.18 349.75,2289.18 381.75,2289.18 413.75,2289.18 445.75,2289.18 477.75,2289.18 509.75,2289.18 541.75,2289.18 573.75,2289.18 605.75,2289.18 637.75,2289.18 669.75,2289.18 701.75,2289.18 733.75,2289.18 765.75,2289.18 797.75,2289.18 829.75,2289.18 861.75,2288.94 893.08,2295.43 3881.4,2295.02 3802.6,2299.03 919.89,2312.91 71.51,2315.85 3881.4,2327.02 3802.6,2331.03 937.73,2339.48 88.69,2342.84 3881.4,2359.02 115.07,2360.97 3802.6,2363.03 146.28,2368.04 178.28,2367.98 210.28,2367.98 242.28,2367.98 274.28,2367.98 306.28,2367.98 338.28,2367.98 370.28,2367.98 402.28,2367.98 434.28,2367.98 466.28,2367.98 498.28,2367.98 530.28,2367.98 562.28,2367.98 594.28,2367.98 626.28,2367.98 658.28,2367.98 690.28,2367.98 722.28,2367.98 754.28,2367.98 786.28,2367.98 818.28,2367.98 850.28,2367.98 944.57,2370.73 115.83,2381.83 3881.4,2391.02 3802.6,2395.03 89.28,2399.69 938.35,2402.12 3881.4,2423.02 71.82,2426.51 3802.6,2427.03 921.05,2429.04 894.6,2447.05 3881.4,2455.02 65.36,2457.85 3802.6,2459.03 160.18,2461.08 192.18,2461.08 224.18,2461.08 256.18,2461.08 288.18,2461.08 320.18,2461.08 352.18,2461.08 384.18,2461.08 416.18,2461.08 448.18,2461.08 480.18,2461.08 512.18,2461.08 544.18,2461.08 576.18,2461.08 608.18,2461.08 640.18,2461.08 672.18,2461.08 704.18,2461.08 736.18,2461.08 768.18,2461.08 800.18,2461.08 832.18,2461.08 864.18,2461.06 895.36,2468.27 921.63,2486.54 3881.4,2487.02 72.09,2489.14 3802.6,2491.03 938.66,2513.63 89.77,2515.81 3881.4,2519.02 3802.6,2523.03 116.47,2533.44 147.76,2540.13 179.76,2539.88 211.76,2539.88 243.76,2539.88 275.76,2539.88 307.76,2539.88 339.76,2539.88 371.76,2539.88 403.76,2539.88 435.76,2539.88 467.76,2539.88 499.76,2539.88 531.76,2539.88 563.76,2539.88 595.76,2539.88 627.76,2539.88 659.76,2539.88 691.76,2539.88 723.76,2539.88 755.76,2539.88 787.76,2539.88 819.76,2539.88 851.76,2539.88 944.46,2545.1 3881.4,2551.02 3802.6,2555.03 90.33,2570.53 937.4,2576.31 3881.4,2583.02 3802.6,2587.03 72.39,2597.03 919.29,2602.7 3881.4,2615.02 3802.6,2619.03 65.47,2628.27 157.7,2632.98 189.7,2632.98 221.7,2632.98 253.7,2632.98 285.7,2632.98 317.7,2632.98 349.7,2632.98 381.7,2632.98 413.7,2632.98 445.7,2632.98 477.7,2632.98 509.7,2632.98 541.7,2632.98 573.7,2632.98 605.7,2632.98 637.7,2632.98 669.7,2632.98 701.7,2632.98 733.7,2632.98 765.7,2632.98 797.7,2632.98 829.7,2632.98 861.7,2632.74 893.04,2639.2 3881.4,2647.02 3802.6,2651.03 919.86,2656.66 71.53,2659.69 3881.4,2679.02 937.71,2683.22 3802.6,2683.03 88.73,2686.67 115.12,2704.78 3881.4,2711.02 146.33,2711.84 178.33,2711.77 210.33,2711.77 242.33,2711.77 274.33,2711.77 306.33,2711.77 338.33,2711.77 370.33,2711.77 402.33,2711.77 434.33,2711.77 466.33,2711.77 498.33,2711.77 530.33,2711.77 562.33,2711.77 594.33,2711.77 626.33,2711.77 658.33,2711.77 690.33,2711.77 722.33,2711.77 754.33,2711.77 786.33,2711.77 818.33,2711.77 850.33,2711.77 1128.06,2712.06 1316.42,2712.17 1471.78,2712.07 1660.28,2712.18 1815.51,2712.08 2004.13,2712.19 2159.23,2712.09 2347.99,2712.2 2502.96,2712.1 2691.84,2712.21 2846.69,2712.1 3035.69,2712.22 3190.42,2712.11 944.57,2714.48 1159.92,2715.11 1284.53,2714.89 1503.64,2715.09 1628.39,2714.87 1847.37,2715.07 1972.24,2714.85 2191.09,2715.06 2316.1,2714.84 2534.82,2715.04 2659.95,2714.82 2878.55,2715.02 3003.8,2714.81 3222.29,2715.01 3802.6,2715.03 1097.35,2721.06 1347.03,2721.49 1441.08,2721.1 1784.81,2721.13 2128.55,2721.17 2472.28,2721.2 2816.02,2721.23 3159.75,2721.26 1690.88,2721.53 2034.73,2721.56 2378.58,2721.6 2722.42,2721.63 3066.27,2721.66 115.88,2725.6 3362.6,2727.24 1188.05,2730.36 1256.25,2729.86 1531.78,2730.32 1600.09,2729.82 1875.52,2730.28 1943.94,2729.78 2219.26,2730.24 2287.78,2729.74 2563,2730.2 2631.62,2729.7 2906.74,2730.17 2975.46,2729.66 3250.49,2730.13 3394.45,2730.24 3331.9,2736.28 1072.61,2741.35 1416.35,2741.41 1760.1,2741.46 1371.56,2742.04 1715.39,2742.1 2059.23,2742.15 2103.85,2741.52 2403.06,2742.21 2447.6,2741.57 2746.89,2742.26 2791.35,2741.62 3090.72,2742.31 3135.11,2741.67 89.32,2743.44 3881.4,2743.02 3422.6,2745.46 938.37,2745.87 3802.6,2747.03 1235.55,2754.26 1579.38,2754.2 1923.2,2754.15 2267.02,2754.09 2610.84,2754.04 2954.66,2753.99 1208.5,2754.98 1552.25,2754.92 1896.01,2754.86 2239.77,2754.81 2583.53,2754.75 2927.29,2754.7 3271.05,2754.65 3307.18,2756.6 1057.16,2769.38 1400.93,2769.45 71.84,2770.25 1744.71,2769.52 2088.48,2769.58 2432.25,2769.65 2776.03,2769.71 3119.8,2769.77 3443.08,2770.05 921.09,2772.8 3881.4,2775.02 3802.6,2779.03 1226.04,2784.82 1569.84,2784.75 1913.64,2784.69 2257.44,2784.62 2601.24,2784.56 2945.04,2784.51 3291.77,2784.65 894.64,2790.82 1053.5,2801.17 1397.29,2801.24 1741.08,2801.31 2084.87,2801.38 2428.66,2801.45 3452.32,2800.68 65.36,2801.58 2163.67,2802.48 2507.46,2802.41 2772.45,2801.51 2851.25,2802.35 3116.24,2801.57 3195.04,2802.28 1132.29,2802.64 1476.08,2802.59 1819.88,2802.54 160.23,2804.87 192.23,2804.87 224.23,2804.87 256.23,2804.87 288.23,2804.87 320.23,2804.87 352.23,2804.87 384.23,2804.87 416.23,2804.87 448.23,2804.87 480.23,2804.87 512.23,2804.87 544.23,2804.87 576.23,2804.87 608.23,2804.87 640.23,2804.87 672.23,2804.87 704.23,2804.87 736.23,2804.87 768.23,2804.87 800.23,2804.87 832.23,2804.87 864.23,2804.85 1304.19,2807.25 1647.98,2807.31 1991.77,2807.37 2335.56,2807.43 3881.4,2807.02 2679.35,2807.51 3023.14,2807.58 3802.6,2811.03 895.4,2812.08 2944.35,2816.5 3288.14,2816.44 1225.39,2816.81 1569.18,2816.74 1912.98,2816.68 2256.77,2816.62 2600.56,2816.56 921.66,2830.36 72.06,2832.87 1053.5,2833.17 1397.29,2833.24 1741.08,2833.31 2084.87,2833.38 2428.66,2833.45 3452.88,2832.68 2163.67,2834.48 2507.46,2834.41 2772.45,2833.51 2851.25,2834.35 3116.24,2833.57 3195.04,2834.28 3366.93,2834.48 1132.29,2834.64 1476.08,2834.59 1819.88,2834.54 1304.19,2839.25 1647.98,2839.31 1991.77,2839.37 2335.56,2839.43 3881.4,2839.02 2679.35,2839.51 3023.14,2839.58 3802.6,2843.03 2944.35,2848.5 3288.14,2848.44 1225.39,2848.81 1569.18,2848.74 1912.98,2848.68 2256.77,2848.62 2600.56,2848.56 938.68,2857.46 89.72,2859.56 1053.5,2865.17 1397.29,2865.24 1741.08,2865.31 2084.87,2865.38 2428.66,2865.45 3452.88,2864.68 2163.67,2866.48 2507.46,2866.41 2772.45,2865.51 2851.25,2866.35 3116.24,2865.57 3195.04,2866.28 3366.93,2866.48 1132.29,2866.64 1476.08,2866.59 1819.88,2866.54 1304.19,2871.25 1647.98,2871.31 1991.77,2871.37 2335.56,2871.43 3881.4,2871.02 2679.35,2871.51 3023.14,2871.58 3802.6,2875.03 116.41,2877.21 2944.35,2880.5 3288.14,2880.44 1225.39,2880.81 1569.18,2880.74 1912.98,2880.68 2256.77,2880.62 2600.56,2880.56 147.7,2883.91 179.7,2883.67 211.7,2883.67 243.7,2883.67 275.7,2883.67 307.7,2883.67 339.7,2883.67 371.7,2883.67 403.7,2883.67 435.7,2883.67 467.7,2883.67 499.7,2883.67 531.7,2883.67 563.7,2883.67 595.7,2883.67 627.7,2883.67 659.7,2883.67 691.7,2883.67 723.7,2883.67 755.7,2883.67 787.7,2883.67 819.7,2883.67 851.7,2883.67 944.46,2888.94 1053.5,2897.17 1397.29,2897.24 1741.08,2897.31 2084.87,2897.38 2428.66,2897.45 3452.88,2896.68 2163.67,2898.48 2507.46,2898.41 2772.45,2897.51 2851.25,2898.35 3116.24,2897.57 3195.04,2898.28 3366.93,2898.48 1132.29,2898.64 1476.08,2898.59 1819.88,2898.54 1304.19,2903.25 1647.98,2903.31 1991.77,2903.37 2335.56,2903.43 3881.4,2903.02 502.84,2904.19 2679.35,2903.51 3023.14,2903.58 3802.6,2907.03 2944.35,2912.5 3288.14,2912.44 1225.39,2912.81 1569.18,2912.74 1912.98,2912.68 2256.77,2912.62 2600.56,2912.56 937.39,2920.15 480.05,2926.66 1053.5,2929.17 1397.29,2929.24 1741.08,2929.31 2084.87,2929.38 2428.66,2929.45 3452.88,2928.68 2163.67,2930.48 2507.46,2930.41 2772.45,2929.51 2851.25,2930.35 3116.24,2929.57 3195.04,2930.28 3366.93,2930.48 1132.29,2930.64 1476.08,2930.59 1819.88,2930.54 1304.19,2935.25 1647.98,2935.31 1991.77,2935.37 2335.56,2935.43 3881.4,2935.02 2679.35,2935.51 3023.14,2935.58 3802.6,2939.03 2944.35,2944.5 3288.14,2944.44 1225.39,2944.81 1569.18,2944.74 1912.98,2944.68 2256.77,2944.62 2600.56,2944.56 919.26,2946.52 467.31,2956.01 1053.5,2961.17 1397.29,2961.24 1741.08,2961.31 2084.87,2961.38 2428.66,2961.45 3452.88,2960.68 2163.67,2962.48 2507.46,2962.41 2772.45,2961.51 2851.25,2962.35 3116.24,2961.57 3195.04,2962.28 3366.93,2962.48 1132.29,2962.64 1476.08,2962.59 1819.88,2962.54 892.27,2963.7 1304.19,2967.25 1647.98,2967.31 1991.77,2967.37 2335.56,2967.43 3881.4,2967.02 2679.35,2967.51 3023.14,2967.58 572.84,2969.61 604.84,2969.61 636.84,2969.61 668.84,2969.61 700.84,2969.61 732.84,2969.61 764.84,2969.61 796.84,2969.61 828.84,2969.61 860.84,2969.74 3802.6,2971.03 2944.35,2976.5 3288.14,2976.44 1225.39,2976.81 1569.18,2976.74 1912.98,2976.68 2256.77,2976.62 2600.56,2976.56 544.4,2984.27 465.6,2987.96 1053.5,2993.17 1397.29,2993.24 1741.08,2993.31 2084.87,2993.38 2428.66,2993.45 3452.88,2992.68 2163.67,2994.48 2507.46,2994.41 2772.45,2993.51 2851.25,2994.35 3116.24,2993.57 3195.04,2994.28 3366.93,2994.48 1132.29,2994.64 1476.08,2994.59 1819.88,2994.54 1304.19,2999.25 1647.98,2999.31 1991.77,2999.37 2335.56,2999.43 3881.45,2999.02 2679.35,2999.51 3023.14,2999.58 3802.64,3003.03 2944.35,3008.5 3288.14,3008.44 1225.39,3008.81 1569.18,3008.74 1912.98,3008.68 2256.77,3008.62 2600.56,3008.56 544.4,3016.27 465.6,3019.96 1053.5,3025.17 1397.29,3025.24 1741.08,3025.31 2084.87,3025.38 2428.66,3025.45 3452.88,3024.68 2163.67,3026.48 2507.46,3026.41 2772.45,3025.51 2851.25,3026.35 3116.24,3025.57 3195.04,3026.28 3366.93,3026.48 1132.29,3026.64 1476.08,3026.59 1819.88,3026.54 3890.14,3029.82 1304.19,3031.25 1647.98,3031.31 1991.77,3031.37 2335.56,3031.43 2679.35,3031.51 3023.14,3031.58 3807.37,3034.68 2944.35,3040.5 3288.14,3040.44 1225.39,3040.81 1569.18,3040.74 1912.98,3040.68 2256.77,3040.62 2600.56,3040.56 544.4,3048.27 465.55,3051.96 3913.23,3051.97 1053.5,3057.17 1397.29,3057.24 1741.08,3057.31 2084.87,3057.38 2428.66,3057.45 3452.88,3056.68 2163.67,3058.48 2507.46,3058.41 2772.45,3057.51 2851.25,3058.35 3116.24,3057.57 3195.04,3058.28 3366.93,3058.48 1132.29,3058.64 1476.08,3058.59 1819.88,3058.54 3944.3,3059.62 3976.3,3059.62 4008.3,3059.62 4040.3,3059.62 4072.3,3059.62 4104.28,3060.7 1304.19,3063.25 1647.98,3063.31 1991.77,3063.37 2335.56,3063.43 2679.35,3063.51 3023.14,3063.58 3818.85,3064.55 2944.35,3072.5 3288.14,3072.44 1225.39,3072.81 1569.18,3072.74 1912.98,3072.68 2256.77,3072.62 2600.56,3072.56 551.86,3079.39 469.66,3083.7 4697.37,3084.28 4153.4,3085.6 4185.4,3085.6 4217.4,3085.6 4249.4,3085.6 4281.4,3085.6 4313.4,3085.6 4345.4,3085.6 4377.4,3085.6 4409.4,3085.6 4441.4,3085.6 4473.4,3085.6 4505.4,3085.6 4537.4,3085.6 4569.4,3085.6 4601.4,3085.6 4633.4,3085.6 4665.4,3085.6 4728,3088 1053.5,3089.17 1397.29,3089.24 1741.08,3089.31 2084.87,3089.38 2428.66,3089.45 3452.88,3088.68 2163.67,3090.48 2507.46,3090.41 2772.45,3089.51 2851.25,3090.35 3116.24,3089.57 3195.04,3090.28 3366.93,3090.48 1132.29,3090.64 1476.08,3090.59 1819.88,3090.54 3837.23,3090.75 1304.19,3095.25 1647.98,3095.31 1991.77,3095.37 2335.56,3095.43 2679.35,3095.51 3023.14,3095.58 573.83,3102.65 2944.35,3104.5 3288.14,3104.44 1225.39,3104.81 1569.18,3104.74 1912.98,3104.68 2256.77,3104.62 2600.56,3104.56 5845.68,3108.34 5877.68,3108.34 4789.73,3110.21 4821.73,3110.21 4853.73,3110.21 4885.73,3110.21 4917.73,3110.21 4949.73,3110.21 4981.73,3110.21 5013.73,3110.21 5045.73,3110.21 5077.73,3110.21 5109.73,3110.21 5141.73,3110.21 5173.73,3110.21 5205.73,3110.21 5237.73,3110.21 5269.73,3110.21 5301.73,3110.21 5333.73,3110.21 5365.73,3110.21 5397.73,3110.21 5429.73,3110.21 5461.73,3110.21 5493.73,3110.21 5525.73,3110.21 5557.73,3110.21 5589.73,3110.21 5621.73,3110.21 5653.73,3110.21 5685.73,3110.21 5717.73,3110.21 5749.73,3110.21 5781.73,3110.21 5813.73,3110.21 604.59,3111.49 636.59,3111.59 668.59,3111.59 700.59,3111.59 732.59,3111.59 764.59,3111.59 796.59,3111.59 828.59,3111.59 860.59,3111.59 892.59,3111.59 924.59,3111.59 956.59,3111.59 3552.17,3111.59 3584.17,3111.59 3616.17,3111.59 3648.17,3111.59 3680.17,3111.59 3712.17,3111.59 3744.17,3111.59 3776.17,3111.59 3808.17,3111.59 3840.17,3111.59 480.57,3113.78 988.38,3115.2 3520.31,3114.59 1053.5,3121.17 1397.29,3121.24 1741.08,3121.31 2084.87,3121.38 2428.66,3121.45 3452.88,3120.68 2163.67,3122.48 2507.46,3122.41 2772.45,3121.51 2851.25,3122.35 3116.24,3121.57 3195.04,3122.28 3366.93,3122.48 1132.29,3122.64 1476.08,3122.59 1819.88,3122.54 1304.19,3127.25 1647.98,3127.31 1991.77,3127.37 2335.56,3127.43 2679.35,3127.51 3023.14,3127.58 3491.81,3129.15 1016.44,3130.59 2944.35,3136.5 3288.14,3136.44 1225.39,3136.81 1569.18,3136.74 1912.98,3136.68 2256.77,3136.62 2600.56,3136.56 498.28,3140.43 1053.5,3153.17 1397.29,3153.24 1741.08,3153.31 2084.87,3153.38 2428.66,3153.45 3470.77,3153.26 2163.67,3154.48 2507.46,3154.41 2772.45,3153.51 2851.25,3154.35 3116.24,3153.57 3195.04,3154.28 3366.93,3154.48 1132.29,3154.64 1476.08,3154.59 1819.88,3154.54 1304.19,3159.25 1647.98,3159.31 1991.77,3159.37 2335.56,3159.43 2679.35,3159.51 3023.14,3159.58 521.36,3162.6 4173.35,3164.4 4205.35,3164.4 4237.35,3164.4 4269.35,3164.4 4301.35,3164.4 4333.35,3164.4 4365.35,3164.4 4397.35,3164.4 4429.35,3164.4 2944.35,3168.5 3288.14,3168.44 1225.39,3168.81 1569.18,3168.74 1912.98,3168.68 2256.77,3168.62 2600.56,3168.56 549.11,3178.55 3460.83,3183.68 1053.5,3185.17 1397.29,3185.24 1741.08,3185.31 2084.87,3185.38 2428.66,3185.45 2163.67,3186.48 2507.46,3186.41 2772.45,3185.51 2851.25,3186.35 3116.24,3185.57 3195.04,3186.28 3366.93,3186.48 1132.29,3186.64 1476.08,3186.59 1819.88,3186.54 4111.21,3186.52 579.65,3188.1 4790.61,3189 4822.61,3189 4854.61,3189 4886.61,3189 4918.61,3189 4950.61,3189 4982.61,3189 5014.61,3189 5046.61,3189 5078.61,3189 5110.61,3189 5142.61,3189 5174.61,3189 5206.61,3189 5238.61,3189 5270.61,3189 5302.61,3189 5334.61,3189 5366.61,3189 5398.61,3189 5430.61,3189 5462.61,3189 5494.61,3189 5526.61,3189 5558.61,3189 5590.61,3189 5622.61,3189 5654.61,3189 5686.61,3189 5718.61,3189 5750.61,3189 5782.61,3189 5814.61,3189.06 611.57,3190.38 643.57,3190.38 675.57,3190.38 707.57,3190.38 739.57,3190.38 771.57,3190.38 803.57,3190.38 835.57,3190.38 867.57,3190.38 899.57,3190.38 931.57,3190.38 3567.44,3190.38 3599.44,3190.38 3631.44,3190.38 3663.44,3190.38 3695.44,3190.38 3727.44,3190.38 3759.44,3190.38 3791.44,3190.38 3823.44,3190.38 3855.44,3190.38 3887.44,3190.38 3919.44,3190.38 3951.44,3190.38 3983.44,3190.38 4015.44,3190.38 4047.44,3190.38 4079.44,3190.38 4410.26,3189.68 963.56,3190.64 1304.19,3191.25 1647.98,3191.31 1991.77,3191.37 2335.56,3191.43 5846.56,3190.87 5878.56,3190.87 2679.35,3191.51 3023.14,3191.58 2944.35,3200.5 3288.14,3200.44 1225.39,3200.81 1569.18,3200.74 1912.98,3200.68 2256.77,3200.62 2600.56,3200.56 3538.15,3203.28 4715.66,3213.84 4523.68,3214.99 4555.68,3214.99 4587.68,3214.99 4619.68,3214.99 4651.68,3214.99 4683.68,3214.99 1053.5,3217.17 1397.29,3217.24 1741.08,3217.31 2084.87,3217.38 2428.66,3217.45 4393.56,3216.98 2163.67,3218.48 2507.46,3218.41 2772.45,3217.51 2851.25,3218.35 3116.24,3217.57 3195.04,3218.28 3366.93,3218.48 1132.29,3218.64 1476.08,3218.59 1819.88,3218.54 967.55,3222.39 4492.46,3221.99 1304.19,3223.25 1647.98,3223.31 1991.77,3223.37 2335.56,3223.43 2679.35,3223.51 3023.14,3223.58 2944.35,3232.5 3288.14,3232.44 1225.39,3232.81 1569.18,3232.74 1912.98,3232.68 2256.77,3232.62 2600.56,3232.56 3528.58,3233.81 4468.8,3243.54 3392.55,3245.72 4383.57,3247.38 1053.5,3249.17 1397.29,3249.24 1741.08,3249.31 2084.87,3249.38 2428.66,3249.45 2163.67,3250.48 2507.46,3250.41 2772.45,3249.51 2851.25,3250.35 3116.24,3249.57 3195.04,3250.28 3366.93,3250.48 1132.29,3250.64 1476.08,3250.59 1819.88,3250.54 967.55,3254.39 1304.19,3255.25 1647.98,3255.31 1991.77,3255.37 2335.56,3255.43 2679.35,3255.51 3023.14,3255.58 3507.83,3258.17 2944.35,3264.5 3288.14,3264.44 1225.39,3264.81 1569.18,3264.74 1912.98,3264.68 2256.77,3264.62 2600.56,3264.56 3417.03,3266.33 3479.51,3273.08 4459.59,3274.19 3447.62,3275.72 4380.6,3279.25 1053.5,3281.17 1397.29,3281.24 1741.08,3281.31 2084.87,3281.38 2428.66,3281.45 2163.67,3282.48 2507.46,3282.41 2772.45,3281.51 2851.25,3282.35 3116.24,3281.57 3195.04,3282.28 3366.93,3282.48 1132.29,3282.64 1476.08,3282.59 1819.88,3282.54 967.55,3286.39 1304.19,3287.25 1647.98,3287.31 1991.77,3287.37 2335.56,3287.43 2679.35,3287.51 3023.14,3287.58 2944.35,3296.5 3288.14,3296.44 1225.39,3296.81 1569.18,3296.74 1912.98,3296.68 2256.77,3296.62 2600.56,3296.56 4459.4,3306.18 4380.6,3311.25 1053.5,3313.17 1397.29,3313.24 1741.08,3313.31 2084.87,3313.38 2428.66,3313.45 2163.67,3314.48 2507.46,3314.41 2772.45,3313.51 2851.25,3314.35 3116.24,3313.57 3195.04,3314.28 3366.93,3314.48 1132.29,3314.64 1476.08,3314.59 1819.88,3314.54 967.55,3318.39 1304.19,3319.25 1647.98,3319.31 1991.77,3319.37 2335.56,3319.43 2679.35,3319.51 3023.14,3319.58 2944.35,3328.5 3288.14,3328.44 1225.39,3328.81 1569.18,3328.74 1912.98,3328.68 2256.77,3328.62 2600.56,3328.56 4459.4,3338.18 4380.6,3343.25 1053.5,3345.17 1397.29,3345.24 1741.08,3345.31 2084.87,3345.38 2428.66,3345.45 2163.67,3346.48 2507.46,3346.41 2772.45,3345.51 2851.25,3346.35 3116.24,3345.57 3195.04,3346.28 3366.93,3346.48 1132.29,3346.64 1476.08,3346.59 1819.88,3346.54 967.55,3350.39 1304.19,3351.25 1647.98,3351.31 1991.77,3351.37 2335.56,3351.43 2679.35,3351.51 3023.14,3351.58 2944.35,3360.5 3288.14,3360.44 1225.39,3360.81 1569.18,3360.74 1912.98,3360.68 2256.77,3360.62 2600.56,3360.56 4459.4,3370.18 4380.6,3375.25 1053.5,3377.17 1397.29,3377.24 1741.08,3377.31 2084.87,3377.38 2428.66,3377.45 2163.67,3378.48 2507.46,3378.41 2772.45,3377.51 2851.25,3378.35 3116.24,3377.57 3195.04,3378.28 3366.93,3378.48 1132.29,3378.64 1476.08,3378.59 1819.88,3378.54 967.55,3382.39 1304.19,3383.25 1647.98,3383.31 1991.77,3383.37 2335.56,3383.43 2679.35,3383.51 3023.14,3383.58 2944.35,3392.5 3288.14,3392.44 1225.39,3392.81 1569.18,3392.74 1912.98,3392.68 2256.77,3392.62 2600.56,3392.56 4474.51,3398.39 4362.83,3401.86 1053.5,3409.17 1397.29,3409.24 1741.08,3409.31 2084.87,3409.38 2428.66,3409.45 2163.67,3410.48 2507.46,3410.41 2772.45,3409.51 2851.25,3410.35 3116.24,3409.57 3195.04,3410.28 3366.93,3410.48 1132.29,3410.64 1476.08,3410.59 1819.88,3410.54 967.55,3414.39 1304.19,3415.25 1647.98,3415.31 1991.77,3415.37 2335.56,3415.43 2679.35,3415.51 3023.14,3415.58 2944.35,3424.5 3288.14,3424.44 1225.39,3424.81 1569.18,3424.74 1912.98,3424.68 2256.77,3424.62 2600.56,3424.56 4489.34,3426.75 4349.6,3430.99 1053.5,3441.17 1397.29,3441.24 1741.08,3441.31 2084.87,3441.38 2428.66,3441.45 2163.67,3442.48 2507.46,3442.41 2772.45,3441.51 2851.25,3442.35 3116.24,3441.57 3195.04,3442.28 3366.93,3442.48 1132.29,3442.64 1476.08,3442.59 1819.88,3442.54 967.55,3446.39 1304.19,3447.25 1647.98,3447.31 1991.77,3447.37 2335.56,3447.43 2679.35,3447.51 3023.14,3447.58 2944.35,3456.5 3288.14,3456.44 1225.39,3456.81 1569.18,3456.74 1912.98,3456.68 2256.77,3456.62 2600.56,3456.56 4490.43,3458.73 4350.59,3462.98 1053.5,3473.17 1397.29,3473.24 1741.08,3473.31 2084.87,3473.38 2428.66,3473.45 2163.67,3474.48 2507.46,3474.41 2772.45,3473.51 2851.25,3474.35 3116.24,3473.57 3195.04,3474.28 3366.93,3474.48 1132.29,3474.64 1476.08,3474.59 1819.88,3474.54 967.55,3478.39 1304.19,3479.25 1647.98,3479.31 1991.77,3479.37 2335.56,3479.43 2679.35,3479.51 3023.14,3479.58 2944.35,3488.5 3288.14,3488.44 4477.34,3487.93 1225.39,3488.81 1569.18,3488.74 1912.98,3488.68 2256.77,3488.62 2600.56,3488.56 4365.32,3491.39 1053.5,3505.17 1397.29,3505.24 1741.08,3505.31 2084.87,3505.38 2428.66,3505.45 2163.75,3506.48 2507.53,3506.41 2772.45,3505.51 2851.31,3506.35 3116.24,3505.57 3195.09,3506.28 3367.02,3506.48 1132.4,3506.64 1476.18,3506.59 1819.96,3506.54 4453.02,3508.73 967.53,3510.39 1304.2,3511.25 1648,3511.31 1991.79,3511.37 2335.58,3511.43 4390.98,3510.5 2679.37,3511.51 3023.16,3511.58 4422.03,3516.7 1126.45,3538.09 1470.26,3538.04 1814.07,3537.99 2157.89,3537.94 2501.7,3537.88 2845.52,3537.82 3189.34,3537.75 3361.15,3537.94 974.83,3541.55 1296.59,3542.33 1318.64,3541.6 1640.36,3542.38 1662.45,3541.65 1984.13,3542.44 2006.26,3541.7 2327.89,3542.5 2350.08,3541.76 2693.89,3541.83 3037.71,3541.9 2671.66,3542.56 3015.42,3542.63 1849.35,3564.47 2193.09,3564.43 2536.84,3564.38 2880.58,3564.33 3224.32,3564.28 1109.33,3565.12 1161.84,3564.55 1453.15,3565.08 1505.6,3564.51 1796.98,3565.05 2140.81,3565 2484.65,3564.96 2828.49,3564.91 3172.33,3564.86 3344.08,3565.01 993.17,3567.77